# Altium PCB BMS_slave.PcbDoc (part 3 of 5)
Units mm, origin at the board's own origin, x right, y up, seen from the top; angles counter-clockwise.
Board outline 124.71 x 100.58 mm, 4 copper layers (Layer 1 - Top Layer, Layer 2 - GND, Layer 3 - Signal, Layer 4 - Bottom Layer), stack 1.56 mm thick; 370 components, 202 nets, 969 pads, 371 vias.
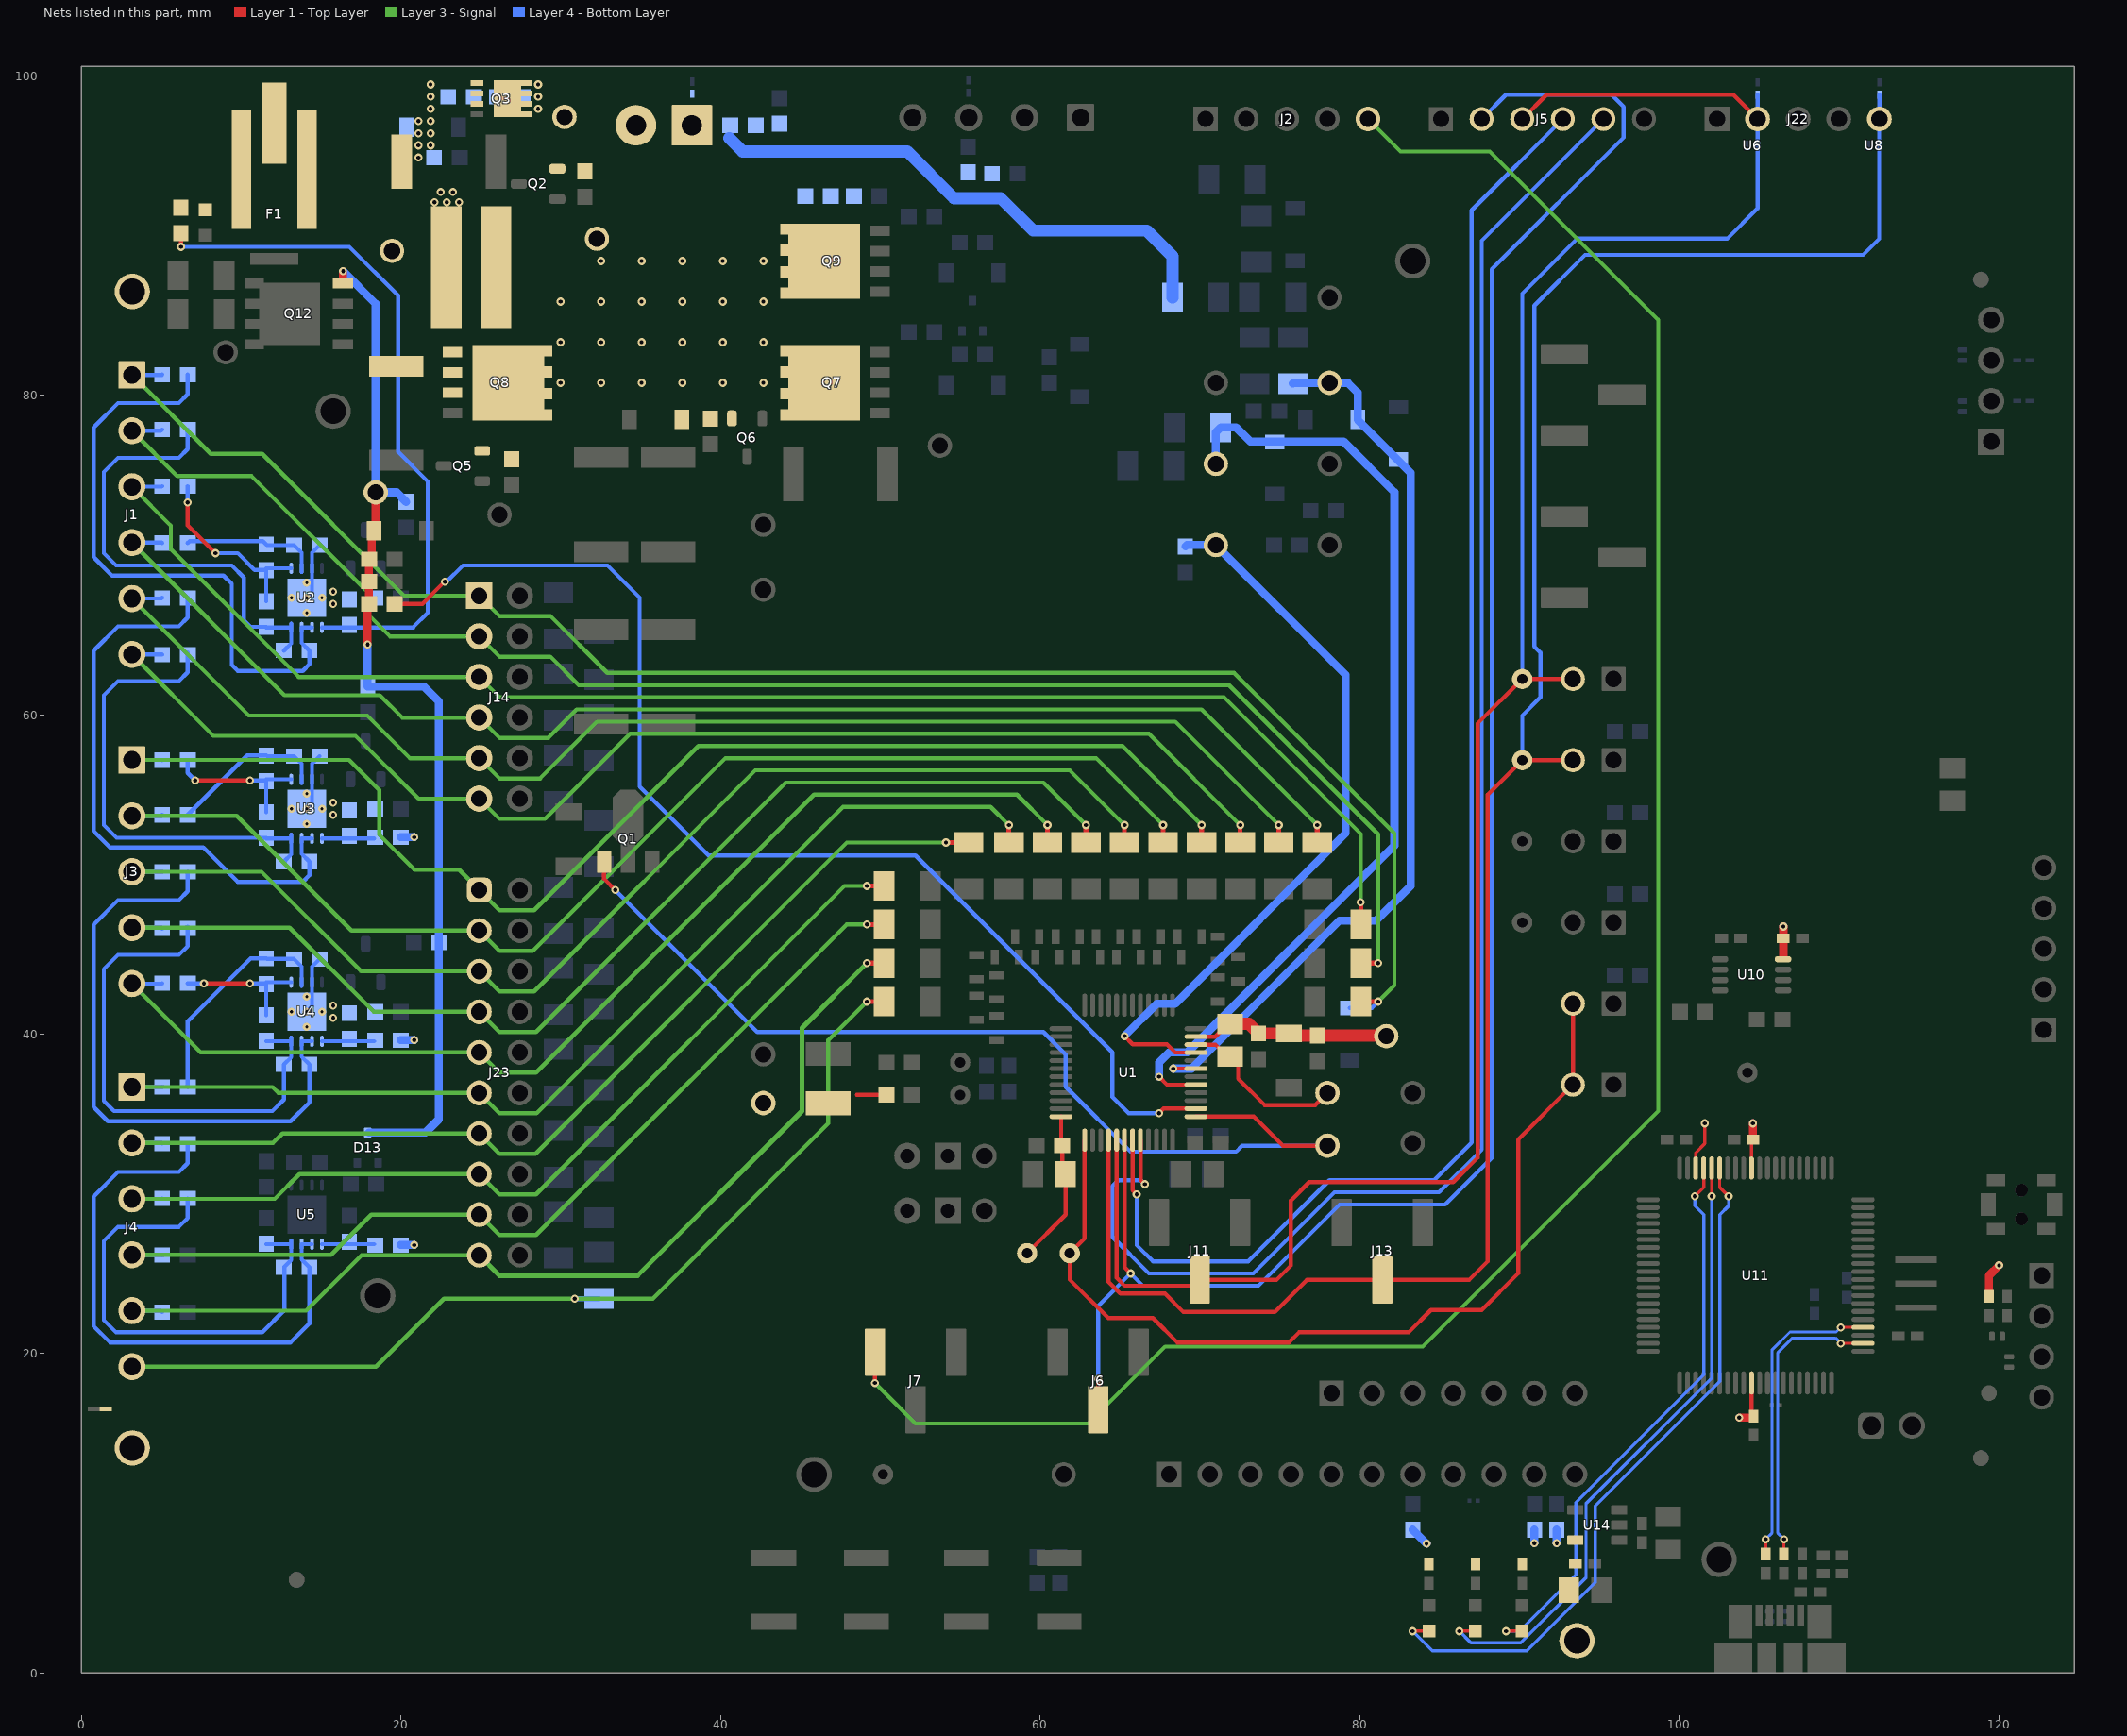
[diagram p4: the nets of this part, all layers, seen from the top]

## Part data (continued)
R61 R62 R63: library part CMP-0025830-4, "RES, 5.1 k, 5%, 0.1 W, AEC-Q200 Grade 0, 0603", Manufacturer=Vishay-Dale, Power_W=100mW, Supplier Part Number 1=541-5.1KGCT-ND, TempCo="200 ppm/C", Tolerance_%=5%, Value2=0.1W, Value_Code=5k10, ValueDisplayed=5.1k, AEC Category=Q200, AEC Grade=0, AEC Qualified=Y, ComponentLink1Description="Datasheet link", ComponentLink1URL=http://www.vishay.com/docs/20035/dcrcwe3.pdf, CompType=Resistor, EIA_Code=E24, MountType=SMT, PackageReference=0603, PartNumber=CRCW06035K10JNEA, Res_ohm=5.1k, RoHS=E, SizeArea_mm2=1.28, SizeX_mm=1.6, SizeY_mm=0.8, SizeZ_mm=1, Supplier 1=Digi-Key, Supplier 2=Newark, Supplier 3=Farnell, Supplier Part Number 2=89M6773, Supplier Part Number 3=1570751, Technology="Thick Film", Value1=5%, VDC_V=75V
R64 R68 R70 R71 R73 R74 R76 R77: library part CMP-0018703-3, "RES, 5.1 k, 5%, 0.25 W, AEC-Q200 Grade 0, 1206", Manufacturer=Vishay-Dale, Power_W=250mW, Supplier Part Number 1=541-5.1KECT-ND, TempCo="200 ppm/C", Tolerance_%=5%, Value2=0.25W, Value_Code=5k10, ValueDisplayed=5.1k, AEC Category=Q200, AEC Grade=0, AEC Qualified=Y, ComponentLink1Description="Datasheet link", ComponentLink1URL=http://www.vishay.com/docs/20035/dcrcwe3.pdf, CompType=Resistor, EIA_Code=E24, MountType=SMT, PackageReference=1206, PartNumber=CRCW12065K10JNEA, Res_ohm=5.1k, RoHS=E, SizeArea_mm2=5.12, SizeX_mm=3.2, SizeY_mm=1.6, SizeZ_mm=1.35, Supplier 1=Digi-Key, Supplier 2=Newark, Supplier 3=Mouser, Supplier Part Number 2=59M8589, Supplier Part Number 3=71-CRCW1206J-5.1K-E3, Technology="Thick Film", Value1=5%, VDC_V=200V
R65: library part CMP-0025855-4, "RES, 7.5 k, 5%, 0.1 W, AEC-Q200 Grade 0, 0603", Manufacturer=Vishay-Dale, Power_W=100mW, Supplier Part Number 1=541-7.5KGCT-ND, TempCo="200 ppm/C", Tolerance_%=5%, Value2=0.1W, Value_Code=7k50, ValueDisplayed=7.5k, AEC Category=Q200, AEC Grade=0, AEC Qualified=Y, ComponentLink1Description="Datasheet link", ComponentLink1URL=http://www.vishay.com/docs/20035/dcrcwe3.pdf, CompType=Resistor, EIA_Code=E24, MountType=SMT, PackageReference=0603, PartNumber=CRCW06037K50JNEA, Res_ohm=7.5k, RoHS=E, SizeArea_mm2=1.28, SizeX_mm=1.6, SizeY_mm=0.8, SizeZ_mm=1, Supplier 1=Digi-Key, Supplier 2=Newark, Supplier 3=Mouser, Supplier Part Number 2=59M6832, Supplier Part Number 3=71-CRCW0603J-7.5K-E3, Technology="Thick Film", Value1=5%, VDC_V=75V
R66: library part CMP-0025753-4, "RES, 20 k, 5%, 0.1 W, AEC-Q200 Grade 0, 0603", Manufacturer=Vishay-Dale, PartNumber=CRCW060320K0JNEA, Power_W=100mW, Supplier Part Number 1=541-20KGCT-ND, TempCo="200 ppm/C", Tolerance_%=5%, Value2=0.1W, Value_Code=20k0, ValueDisplayed=20k, AEC Category=Q200, AEC Grade=0, AEC Qualified=Y, ComponentLink1Description="Datasheet link", ComponentLink1URL=http://www.vishay.com/docs/20035/dcrcwe3.pdf, CompType=Resistor, EIA_Code=E24, LatestRevisionDate=2017-06-13, MountType=SMT, PackageReference=0603, Published=2008-06-26, Publisher="Texas Instruments", Res_ohm=20k, RoHS=E, SizeArea_mm2=1.28, SizeX_mm=1.6, SizeY_mm=0.8, SizeZ_mm=1, Supplier 1=Digi-Key, Supplier 2=Newark, Supplier 3=Mouser, Supplier Part Number 2=59M6783, Supplier Part Number 3=71-CRCW0603J-20K-E3, SymbolVersion=2009-05-29, Technology="Thick Film", U/M=EA, Value1=5%, VDC_V=75V
R80: library part CMP-0025766-4, "RES, 27 k, 5%, 0.1 W, AEC-Q200 Grade 0, 0603", Manufacturer=Vishay-Dale, Power_W=100mW, Supplier Part Number 1=541-27KGCT-ND, TempCo="200 ppm/C", Tolerance_%=5%, Value2=0.1W, Value_Code=27k0, ValueDisplayed=27k, AEC Category=Q200, AEC Grade=0, AEC Qualified=Y, ComponentLink1Description="Datasheet link", ComponentLink1URL=http://www.vishay.com/docs/20035/dcrcwe3.pdf, CompType=Resistor, EIA_Code=E24, MountType=SMT, PackageReference=0603, PartNumber=CRCW060327K0JNEA, Res_ohm=27k, RoHS=E, SizeArea_mm2=1.28, SizeX_mm=1.6, SizeY_mm=0.8, SizeZ_mm=1, Supplier 1=Digi-Key, Supplier 2=Newark, Supplier 3=Mouser, Supplier Part Number 2=59M6792, Supplier Part Number 3=71-CRCW0603J-27K-E3, Technology="Thick Film", Value1=5%, VDC_V=75V
R87 R88 R90 R93 R95 R96 R98 R100 R101 R102 R103 R104 R105 R106 R107 R108: library part CMP-0016776-3, "RES, 200, 1%, 0.25 W, AEC-Q200 Grade 0, 1206", Manufacturer=Vishay-Dale, Power_W=250mW, Supplier Part Number 1=541-200FCT-ND, TempCo="100 ppm/C", Tolerance_%=1%, Value2=0.25W, Value_Code=200R, ValueDisplayed=200, AEC Category=Q200, AEC Grade=0, AEC Qualified=Y, ComponentLink1Description="Datasheet link", ComponentLink1URL=http://www.vishay.com/docs/20035/dcrcwe3.pdf, CompType=Resistor, EIA_Code=E96, MountType=SMT, PackageReference=1206, PartNumber=CRCW1206200RFKEA, Res_ohm=200, RoHS=E, SizeArea_mm2=5.12, SizeX_mm=3.2, SizeY_mm=1.6, SizeZ_mm=1.35, Supplier 1=Digi-Key, Supplier 2=Newark, Supplier 3=Mouser, Supplier Part Number 2=53K2137, Supplier Part Number 3=71-CRCW1206-200-E3, Technology="Thick Film", Value1=1%, VDC_V=200V
R114 R115: library part CMP-0026908-3, "RES, 33, 5%, 0.063 W, AEC-Q200 Grade 0, 0402", Manufacturer=Vishay-Dale, PartNumber=CRCW040233R0JNED, Power_W=63mW, Supplier Part Number 1=541-33JCT-ND, TempCo="200 ppm/C", Tolerance_%=5%, Value2=0.063W, Value_Code=33R0, ValueDisplayed=33, AEC Category=Q200, AEC Grade=0, AEC Qualified=Y, ComponentLink1Description="Datasheet link", ComponentLink1URL=http://www.vishay.com/docs/20035/dcrcwe3.pdf, CompType=Resistor, EIA_Code=E24, LatestRevisionDate=2017-06-12, MountType=SMT, PackageReference=0402, Published=2008-06-26, Publisher="Texas Instruments", Res_ohm=33, RoHS=E, SizeArea_mm2=0.5, SizeX_mm=1, SizeY_mm=0.5, SizeZ_mm=0.6, Supplier 1=Digi-Key, Supplier 2=Newark, Supplier 3=Mouser, Supplier Part Number 2=72M6782, Supplier Part Number 3=71-CRCW0402J-33-E3, SymbolVersion=2009-05-29, Technology="Thick Film", U/M=EA, Value1=5%, VDC_V=50V
R116: library part CMP-0026889-5, "RES, 2.0 k, 5%, 0.063 W, AEC-Q200 Grade 0, 0402", Manufacturer=Vishay-Dale, PartNumber=CRCW04022K00JNED, Power_W=63mW, Supplier Part Number 1=541-2.0KJCT-ND, TempCo="200 ppm/C", Tolerance_%=5%, Value2=0.063W, Value_Code=2k00, ValueDisplayed=2.0k, AEC Category=Q200, AEC Grade=0, AEC Qualified=Y, ComponentLink1Description="Datasheet link", ComponentLink1URL=http://www.vishay.com/docs/20035/dcrcwe3.pdf, CompType=Resistor, EIA_Code=E24, LatestRevisionDate=2017-06-12, MountType=SMT, PackageReference=0402, Published=2008-06-26, Publisher="Texas Instruments", Res_ohm=2k, RoHS=E, SizeArea_mm2=0.5, SizeX_mm=1, SizeY_mm=0.5, SizeZ_mm=0.6, Supplier 1=Digi-Key, Supplier 2=Newark, Supplier 3=Mouser, Supplier Part Number 2=59M6709, Supplier Part Number 3=71-CRCW0402J-2K-E3, SymbolVersion=2009-05-29, Technology="Thick Film", U/M=EA, Value1=5%, VDC_V=50V
R117 R123: library part CMP-0026825-5, "RES, 10 k, 5%, 0.063 W, AEC-Q200 Grade 0, 0402", Manufacturer=Vishay-Dale, PartNumber=CRCW040210K0JNED, Power_W=63mW, Supplier Part Number 1=541-10KJCT-ND, TempCo="200 ppm/C", Tolerance_%=5%, Value2=0.063W, Value_Code=10k0, ValueDisplayed=10k, AEC Category=Q200, AEC Grade=0, AEC Qualified=Y, ComponentLink1Description="Datasheet link", ComponentLink1URL=http://www.vishay.com/docs/20035/dcrcwe3.pdf, CompType=Resistor, EIA_Code=E24, LatestRevisionDate=2017-06-12, MountType=SMT, PackageReference=0402, Published=2008-06-26, Publisher="Texas Instruments", Res_ohm=10k, RoHS=E, SizeArea_mm2=0.5, SizeX_mm=1, SizeY_mm=0.5, SizeZ_mm=0.6, Supplier 1=Digi-Key, Supplier 2=Newark, Supplier 3=Mouser, Supplier Part Number 2=59M6696, Supplier Part Number 3=71-CRCW0402J-10K-E3, SymbolVersion=2009-05-29, Technology="Thick Film", U/M=EA, Value1=5%, VDC_V=50V
R118 R119: library part CMP-0026859-2, "RES, 1.0 M, 5%, 0.063 W, AEC-Q200 Grade 0, 0402", Manufacturer=Vishay-Dale, PartNumber=CRCW04021M00JNED, Power_W=63mW, Supplier Part Number 1=541-1.0MJCT-ND, TempCo="200 ppm/C", Tolerance_%=5%, Value2=0.063W, Value_Code=1M00, ValueDisplayed=1.0M, AEC Category=Q200, AEC Grade=0, AEC Qualified=Y, ComponentLink1Description="Datasheet link", ComponentLink1URL=http://www.vishay.com/docs/20035/dcrcwe3.pdf, CompType=Resistor, EIA_Code=E24, LatestRevisionDate=2017-06-12, MountType=SMT, PackageReference=0402, Published=2008-06-26, Publisher="Texas Instruments", Res_ohm=1M, RoHS=E, SizeArea_mm2=0.5, SizeX_mm=1, SizeY_mm=0.5, SizeZ_mm=0.6, Supplier 1=Digi-Key, Supplier 2=Newark, Supplier 3=Mouser, Supplier Part Number 2=59M6694, Supplier Part Number 3=71-CRCW0402J-1M-E3, SymbolVersion=2009-05-29, Technology="Thick Film", U/M=EA, Value1=5%, VDC_V=50V
R120 R121 R122: library part CMP-0026694-1, "RES, 330, 1%, 0.1 W, AEC-Q200 Grade 0, 0402", Manufacturer=Panasonic, PartNumber=ERJ-2RKF3300X, Power_W=100mW, Supplier Part Number 1=P330LCT-ND, TempCo="100 ppm/C", Tolerance_%=1%, Value2=0.1W, Value_Code=330R, ValueDisplayed=330, AEC Category=Q200, AEC Grade=0, AEC Qualified=Y, ComponentLink1Description="Datasheet link", ComponentLink1URL=http://industrial.panasonic.com/lecs/www-data/pdf/AOA0000/AOA0000CE2.pdf, CompType=Resistor, Green_EU RoHS="Passed with Exemption", Green_EU RoHS-2=Incomplete, Green_Lifecycle=Active, Green_REACh=Passed, LatestRevisionDate=2017-03-09, MountType=SMT, PackageReference=0402, Published=2008-06-26, Publisher="Texas Instruments", Res_ohm=330, RoHS=Y, SizeArea_mm2=0.5, SizeX_mm=1, SizeY_mm=0.5, SizeZ_mm=0.6, Supplier 1=Digi-Key, Supplier 2=Newark, Supplier 3=Farnell, Supplier Part Number 2=64R5277, Supplier Part Number 3=2397127, SymbolVersion=2009-05-29, Technology="Thick Film", U/M=EA, Value1=1%, VDC_V=50V
RT1 RT2: library part CMP-0002341-2, "Thermistor NTC, 10.0k ohm, 1%, Disc, 5x8.4 mm", Manufacturer="SEMITEC Corporation", PartNumber=103AT-2, Power_W=10mW, Supplier Part Number 1=954-103AT-2, Tolerance_%=1%, ComponentLink1Description="Datasheet link", ComponentLink1URL=http://www.semitec.co.jp/english2/products/pdf/AT_Thermistor.pdf, CompType=ThermistorNTC, LatestRevisionDate=09/03/2017, MountType=TH, PackageReference="Disc, 5x8.4 mm", Published=22/09/2009, Publisher="Texas Instruments", RoHS=Y, Series=AT, Supplier 1=Mouser, SymbolVersion=2008-11-25, TaMax_C=110°C, TaMin_C=-50°C, U/M=EA
S1 S2: library part CMP-0002132-2, "Switch, Tactile, SPST-NO, SMT", CurrentRating_mA=50A, Manufacturer="C&K Components", PartNumber=KST221JLFS, Supplier Part Number 1=401-1848-1-ND, Circuit=SPST-NO, ComponentLink1Description="Datasheet URL", ComponentLink1URL=http://www.ck-components.com/index.php?module=media&action=Display&cmpref=14404&lang=en&width=&height=&format=&alt=, CompType=Switch, Green_EU RoHS=Passed, Green_EU RoHS-2=Passed, Green_Lifecycle=Active, Green_REACh=Passed, LatestRevisionDate=2017-03-09, MountType=SMT, Orientation="Top Actuated", PackageReference="Switch, 6.2X5X6.2 mm", PositionCount=1, Publisher="Texas Instruments", RoHS=Y, Supplier 1=Digi-Key, Supplier 2=Mouser, Supplier Part Number 2=611-KST221JLFS, SwitchFunction=Off-Mom, SymbolCreator=a0799628, SymbolVersion=2013-06-10, VDC_V=32V
S3: library part CMP-0002246-2, "Switch, SPST-NO,  Off-Mom, 0.05A, 12VDC, SMD", CurrentRating_mA=50A, Manufacturer="C&K Components", Supplier Part Number 1=CKN10505CT-ND, Circuit=SPST-NO, ComponentLink1Description="Datasheet Link", ComponentLink1URL=http://www.ck-components.com/80184/pts820_4mar13.pdf/, CompType=Switch, LatestRevisionDate=2017-03-09, MountType=SMT, Orientation="Top Actuated", PackageReference=3.9x2.9mm, PartNumber="PTS820 J20M SMTR LFS", PositionCount=1, Publisher="Texas Instruments", RoHS=Y, Supplier 1=Digi-Key, Supplier 2=Mouser, Supplier Part Number 2=611-PTS820J20MSMTR, SwitchFunction=Off-Mom, VDC_V=12V
SH-J1 SH-J2 SH-J3 SH-J4 SH-J5 SH-J6 SH-J7 SH-J8 SH-J9 SH-J10 SH-J11 SH-J12 SH-J13 SH-J14 SH-J15 SH-J16 SH-J17 SH-J18 SH-J19 SH-J20 SH-J21: library part CMP-0003623-3, "Shunt, 100mil, Gold plated, Black", Alternate Manufacturer=3M, Alternate PartNumber=969102-0000-DA, Manufacturer=Samtec, Supplier Part Number 1=SAM8858-ND, ClassName=Shunt, ComponentLink1Description="Datasheet Link", ComponentLink1URL=http://www.samtec.com/ftppub/pdf/SNT.PDF, CompType=Shunt, MountType=N/A, PackageReference=Shunt, PartNumber=SNT-100-BK-G, RoHS=Y, Supplier 1=Digi-Key
TP1: library part CMP-0055147-1, "Test Point, Multipurpose, Red, TH", Color=Red, Manufacturer=Keystone, PartNumber=5010, Supplier Part Number 1=36-5010-ND, CNHeader=FALSE, ComponentLink1Description="Datasheet URL", ComponentLink1URL=http://www.keyelco.com/userAssets/file/M60-2p60.pdf, CompType="Test Point", ContactFinish=Silver, CT=TRUE, Green_EU RoHS=Passed, Green_EU RoHS-2=Incomplete, Green_Lifecycle=Active, Green_REACh=Passed, LatestRevisionDate=26/05/2017, MountType=TH, PackageReference="Red Multipurpose Testpoint", Publisher="Texas Instruments", RoHS=Y, Supplier 1=Digi-Key, Supplier 2=Mouser, Supplier Part Number 2=534-5010
TP2 TP3 TP4 TP5 TP6 TP7 TP8 TP10 TP11 TP12 TP13 TP18 TP19 TP20 TP21 TP22 TP23 TP24 TP25 TP26 TP27 TP28 TP29 TP30 TP31 TP32 TP33 TP34 TP35 TP36 TP37 TP38 TP39 TP40 TP41 TP42: library part CMP-0078143-2, "TEST POINT.  No entry in BOM.", Manufacturer=N/A, CompType=Testpoint, PackageReference=N/A, PartNumber=N/A
TP9: library part CMP-0055148-1, "Test Point, Multipurpose, Black, TH", Color=Black, Manufacturer=Keystone, PartNumber=5011, Supplier Part Number 1=36-5011-ND, CNHeader=FALSE, ComponentLink1Description="Datasheet URL", ComponentLink1URL=http://www.keyelco.com/userAssets/file/M60-2p60.pdf, CompType="Test Point", ContactFinish=Silver, CT=TRUE, Green_EU RoHS=Passed, Green_EU RoHS-2=Incomplete, Green_Lifecycle=Active, Green_REACh=Passed, LatestRevisionDate=26/05/2017, MountType=TH, PackageReference="Black Multipurpose Testpoint", Publisher="Texas Instruments", RoHS=Y, Supplier 1=Digi-Key, Supplier 2=Mouser, Supplier Part Number 2=534-5011
TP14 TP15 TP16 TP17: library part CMP-0055143-1, "Test Point, Compact, Black, TH", Color=Black, Manufacturer=Keystone, Supplier Part Number 1=36-5006-ND, CNHeader=FALSE, ComponentLink1Description="Datasheet URL", ComponentLink1URL=http://www.keyelco.com/userAssets/file/M60-2p60.pdf, CompType="Test Point", ContactFinish=Silver, CT=TRUE, Green_EU RoHS=Passed, Green_EU RoHS-2=Incomplete, Green_Lifecycle=Active, Green_REACh=Passed, LatestRevisionDate=26/05/2017, MountType=TH, PackageReference="Black Compact Testpoint", PartNumber=5006, Publisher="Texas Instruments", RoHS=Y, Supplier 1=Digi-Key, Supplier 2=Mouser, Supplier Part Number 2=534-5006, SymbolVersion=2008-04-04
TP43 TP44: library part CMP-0055142-1, "Test Point, Compact, Red, TH", Color=Red, Manufacturer=Keystone, Supplier Part Number 1=36-5005-ND, CNHeader=FALSE, ComponentLink1Description="Datasheet URL", ComponentLink1URL=http://www.keyelco.com/userAssets/file/M60-2p60.pdf, CompType="Test Point", ContactFinish=Silver, CT=TRUE, Green_EU RoHS=Passed, Green_EU RoHS-2=Passed, Green_Lifecycle=Active, Green_REACh=Passed, LatestRevisionDate=26/05/2017, MountType=TH, PackageReference="Red Compact Testpoint", PartNumber=5005, Publisher="Texas Instruments", RoHS=Y, Supplier 1=Digi-Key, Supplier 2=Mouser, Supplier Part Number 2=534-5005, SymbolVersion=2008-04-04, U/M=EA
TP45: library part CMP-0003825-1, "1mm Test Point, SMT", Manufacturer=Any, PartNumber=TP_SM_1MM, ComponentLink1Description="Datasheet Link", ComponentLink1URL=https://sps06.itg.ti.com/sites/KMS/crossdivteams/altium/docs/ComponentDatasheets/PROBE_TEST_POINT.png, CompType="Test Point", Key=TP_SM_1MM, LatestRevisionDate=2017-03-09, MountType=SMT, PackageReference="1mm Test Point, SMT", Publisher="Texas Instruments", SymbolVersion=2010-10-20
U1: library part CMP-0084229-1, "Multicell Battery Monitor and Protection Family, PFB0048A (TQFP-48)", Alternate Manufacturer="Texas Instruments", Alternate PartNumber=bq76952PFBR, AEC Category=Q200, AEC Qualified=N, ComponentLink1Description="Datasheet Link", ComponentLink1URL=http://www.ti.com/lit/ds/symlink/bq76952.pdf, ComponentLink2Description="Product Folder", ComponentLink2URL=http://www.ti.com/product/bq76952, ComponentLink3Description="Online Datasheet", ComponentLink3URL=http://www.ti.com/product/bq76952/datasheet, CompType=IC, Manufacturer="Texas Instruments", MountType=SMT, PackageDescription=TQFP-48, PackageReference=PFB0048A, PartNumber=bq76952PFBT, SizeArea_mm2=81, SizeAreaWB_mm2=121, SizeX_mm=9, SizeY_mm=9, SizeZ_mm=1.2
U2 U3 U4 U5: library part CMP-0078902-2, "Family 2-5S Overvoltage Protector with Internal Delay Timer, DPJ0008A (WSON-8)", Alternate Manufacturer="Texas Instruments", Alternate PartNumber=BQ771807DPJT, AEC Category=Q200, AEC Qualified=N, ComponentLink1Description="Datasheet Link", ComponentLink1URL=http://www.ti.com/lit/ds/symlink/bq7718.pdf, ComponentLink2Description="Product Folder", ComponentLink2URL=http://www.ti.com/product/bq7718, CompType=IC, Manufacturer="Texas Instruments", MountType=SMT, PackageDescription=WSON-8, PackageReference=DPJ0008A, PartNumber=BQ771807DPJR, RoHS=Y, SizeArea_mm2=12, SizeAreaWB_mm2=20, SizeX_mm=4, SizeY_mm=3, SizeZ_mm=0.8
U6 U7 U8 U9: library part CMP-0043093-3, "Single-Channel ESD in 0402 Package With 10pF Capacitance and 6V Breakdown, DPY0002A (X1SON-2)", Alternate Manufacturer="Texas Instruments", Alternate PartNumber=TPD1E10B06DPYT, Breakdown Voltage(Min)(V)=6, IO Capacitance(Typ)(pF)=10, Operating Temperature Range="-40 to 125 C", Rating=Catalog, AEC Category=Q200, AEC Qualified=N, ComponentLink1Description="Datasheet Link", ComponentLink1URL=http://www.ti.com/lit/ds/symlink/tpd1e10b06.pdf, ComponentLink2Description="Product Folder", ComponentLink2URL=http://www.ti.com/product/tpd1e10b06, ComponentLink3Description="Online Datasheet", ComponentLink3URL=http://www.ti.com/product/tpd1e10b06/datasheet, CompType=IC, Eco-Plan=TBD, Green_EU RoHS=Passed, Green_EU RoHS-2=Passed, Green_Lifecycle=Active, Green_REACh=Passed, IEC 61000-4-2 Air-Gap(+/- kV)=30, IEC 61000-4-2 Contact(+/- kV)=30, IO Leakage Current(nA)=10, Manufacturer="Texas Instruments", MountType=SMT, PackageDescription=X1SON-2, PackageReference=DPY0002A, PartNumber=TPD1E10B06DPYR, RoHS=Y, SizeArea_mm2=0.6, SizeAreaWB_mm2=3.2, SizeX_mm=1.0, SizeY_mm=0.6, SizeZ_mm=0.45
U10: library part CMP-0051048-2, "Dual-Bit Dual Supply Transceiver with Configurable Voltage Translation and 3-State Outputs, DCT0008A, LARGE T&R", F @ Nom Voltage(Max)(Mhz)=150, Generic Part Number=SN74LVC2T45, ICC @ Nom Voltage(Max)(mA)=0.004, Manufacturer="Texas Instruments", Operating Temperature Range(C)="-40 to 85", Rating=Military, tpd @ Nom Voltage(Max)(ns)=17.7,10.3,8.3,7.2, Voltage(Nom)(V)=1.8,2.5,3.3,5, 3-State Output=Yes, AEC Category=Q200, AEC Qualified=N, Bits(#)=2, ComponentLink1Description="Datasheet Link", ComponentLink1URL=http://www.ti.com/lit/ds/symlink/sn74lvc2t45.pdf, ComponentLink2Description="Product Folder", ComponentLink2URL=http://www.ti.com/product/sn74lvc2t45, CompType=IC, DatasheetVersion=SCES516J, Input Type=CMOS/TTL, Logic=True, MountType=SMT, Output Drive (IOL/IOH)(Max)(mA)=32/-32, Output Type=CMOS, PackageDescription=SSOP-8, PackageReference=DCT0008A, PartNumber=SN74LVC2T45DCTR, RoHS=Y, Schmitt Trigger=No, SizeArea_mm2=11.2, SizeAreaWB_mm2=19, SizeX_mm=4, SizeY_mm=2.8, SizeZ_mm=1.3, Sub-Family="Dual Supply Translator", Technology Family=LVC, VCC(Max)(V)=5.5, VCC(Min)(V)=1.65
U11: "25 MHz Mixed Signal Microcontroller with 128 KB Flash, 8192 B SRAM and 63 GPIOs, -40 to 85 degC, 80-pin QFP (PN), Green (RoHS & no Sb/Br)", Frequency(MHz)=25, Manufacturer="Texas Instruments", PartNumber=MSP430F5529IPN, Temp Sensor=Yes, ADC="12-bit SAR", ADC Channels=16, Brown Out Reset=Yes, Code_JEDEC=MS-018, Comparators=Yes, ComponentLink1Description="Manufacturer URL", ComponentLink1URL=http://www.ti.com/, ComponentLink2Description=Datasheet, ComponentLink2URL=http://www.ti.com/general/docs/lit/getliterature.tsp?genericPartNumber=MSP430F5529&fileType=pdf, ComponentLink3Description="Package Specification", ComponentLink3URL=http://www.ti.com/lit/ml/mtqf010a/mtqf010a.pdf, DatasheetVersion=SLAS590I, DMA=3, Eco-Plan="Green (RoHS & no Sb/Br)", Flash(KB)=128, GPIO=63, Mounting Technology="Surface Mount", Multiplier=32x32, PackageDescription="80-Pin Plastic Quad Flat Pack, Body 12 x 12 mm, Pitch 0.5 mm", PackageReference=PN0080A, Real-Time Clock=Yes, SRAM(B)=8192, SubFamily="5 Series", SVS=Yes, Timers - 16-bit=4, USB=1, USCI_A (UART/LIN/IrDA/SPI)=2, USCI_B (I2C & SPI)=2, Watchdog=Yes
U12 U13 U15 U16: library part CMP-0043094-3, "Single-Channel ESD in 0402 Package With 10pF Capacitance and 6V Breakdown, DPY0002A (X1SON-2)", Alternate Manufacturer="Texas Instruments", Alternate PartNumber=TPD1E10B06DPYR, Breakdown Voltage(Min)(V)=6, IO Capacitance(Typ)(pF)=10, Operating Temperature Range="-40 to 125 C", Rating=Catalog, AEC Category=Q200, AEC Qualified=N, ComponentLink1Description="Datasheet Link", ComponentLink1URL=http://www.ti.com/lit/ds/symlink/tpd1e10b06.pdf, ComponentLink2Description="Product Folder", ComponentLink2URL=http://www.ti.com/product/tpd1e10b06, ComponentLink3Description="Online Datasheet", ComponentLink3URL=http://www.ti.com/product/tpd1e10b06/datasheet, CompType=IC, Eco-Plan=TBD, IEC 61000-4-2 Air-Gap(+/- kV)=30, IEC 61000-4-2 Contact(+/- kV)=30, IO Leakage Current(nA)=10, Manufacturer="Texas Instruments", MountType=SMT, PackageDescription=X1SON-2, PackageReference=DPY0002A, PartNumber=TPD1E10B06DPYT, RoHS=Y, SizeArea_mm2=0.6, SizeAreaWB_mm2=3.2, SizeX_mm=1.0, SizeY_mm=0.6, SizeZ_mm=0.45
U14: "Single Output LDO, 150 mA, Fixed 3.3 V Output, 2.7 to 10 V Input, with Low IQ, 5-pin SOT-23 (DBV), -40 to 125 degC, Green (RoHS & no Sb/Br)", Manufacturer="Texas Instruments", PartNumber=TPS76333DBVR, Accuracy(%)=3, Code_JEDEC=MO-178, ComponentLink1Description="Manufacturer URL", ComponentLink1URL=http://www.ti.com/, ComponentLink2Description=Datasheet, ComponentLink2URL=http://www.ti.com/general/docs/lit/getliterature.tsp?genericPartNumber=TPS76333&fileType=pdf, ComponentLink3Description="Package Specification", ComponentLink3URL=http://www.ti.com/litv/pdf/mpds018i, DatasheetVersion=SLVS181H, Eco-Plan="Green (RoHS & no Sb/Br)", Fixed Output Options(V)=3.3, Iout(Max)(A)=0.15, Iq(Typ)(mA)=0.08, Mounting Technology="Surface Mount", PackageDescription="5-Pin Plastic Small Outline, Body 1.60 Ãƒâ€” 2.90 mm, Pitch 0.95 mm", PackageReference=DBV0005A, PackageVersion=4073253-4/K, SubFamily="Single Channel LDO", Vdo(Typ)(mV)=300, Vin(Max)(V)=10, Vin(Min)(V)=2.7, Vout Adj(Max)(V)=3.3, Vout Adj(Min)(V)=3.3
Y1: library part CMP-0084387-1, "Resonator, 4 MHz, 39 pF, AEC-Q200 Grade 1, SMD", Frequency_Fixed=4MHz, Load Capacitance="39 pF", Manufacturer=MuRata, AEC Category=Q200, AEC Grade=1, AEC Qualified=Y, ComponentLink1Description="Datasheet Link", ComponentLink1URL=https://www.murata.com/~/media/webrenewal/support/library/catalog/products/timingdevice/ceralock/p16e.ashx, CompType=Resonator, MountType=SMT, PackageReference="4.5x1.2x2 mm", PartNumber=CSTCR4M00G55B-R0, RoHS=Y, SizeArea_mm2=9, SizeAreaWB_mm2=16.5, SizeX_mm=4.5, SizeY_mm=2, SizeZ_mm=1.2, TaMax_C=125°C, TaMin_C=-40°C
ZZ1: library part CMP-0077236-1, ClassName=AssemblyNote, CompType=AssemblyNote, Key=AssemblyNote, LatestRevisionDate=2017-08-10, Publisher="Texas Instruments"
ZZ2: library part CMP-0077237-1, ClassName=AssemblyNote, CompType=AssemblyNote, Key=AssemblyNote, LatestRevisionDate=2017-08-10, Publisher="Texas Instruments"
ZZ3: library part CMP-0077238-1, ClassName=AssemblyNote, CompType=AssemblyNote, Key=AssemblyNote, LatestRevisionDate=2017-08-10, Publisher="Texas Instruments"

## Via types
v1: diameter 0.508, hole 0.254, Layer 1 - Top Layer to Layer 4 - Bottom Layer, tented both sides, 339 vias
v2: diameter 0.5, hole 0.2, Layer 1 - Top Layer to Layer 4 - Bottom Layer, tented both sides, 32 vias

## Nets (pads, with @x,y where several pads share a name; then routed paths per layer and width w, separated by ;. In a path a pad name is that pad's centre, name@x,y a point inside that pad or via, vN(x,y) a via of type N, cw(c..) or ccw(c..) an arc to the next point about the centre after c; other vN are vias at no path point)
1P: J4.5 J23.19 R23.1 R86.1 | length 62.1
  Layer 1 - Top Layer w0.305: v1(49.149,44.45) R23.1@50.239,44.45
  Layer 3 - Signal w0.254: J4.5@3.148,22.69 14.054,22.69 17.526,26.162 J23.19@24.892,26.162
  Layer 3 - Signal w0.305: J23.19@24.892,26.162 26.162,24.892 34.798,24.892 45.085,35.179 45.085,40.386 v1(49.149,44.45)
  Layer 4 - Bottom Layer w0.254: J4.5@3.148,22.69 4.958,22.69 R86.1@5.042,22.606
2P: J4.4 J23.17 R22.1 R85.1 | length 58.6
  Layer 1 - Top Layer w0.305: v1(49.149,46.863) R22.1@50.239,46.863
  Layer 3 - Signal w0.254: J4.4@3.148,26.19 15.616,26.19 18.128,28.702 J23.17@24.892,28.702 26.162,27.432 28.448,27.432 47.879,46.863 v1(49.149,46.863)
  Layer 4 - Bottom Layer w0.254: J4.4@3.148,26.19 5.014,26.19 R85.1@5.042,26.162
3.3V: C59.2 C64.1 C65.1 C68.1 C69.1 R109.1 R110.1 R111.1 R120.2 R121.2 R122.2 R123.2 TP44.1 U10.8 U11.11 U11.18 U11.50 U14.5 | length 16
  Layer 1 - Top Layer w0.203: U11.18@101.025,31.617 101.025,32.572 101.6,33.147 v1(101.6,34.417) ; U11.11@104.525,31.617 104.525,33.313 C69.1@104.613,33.401
  Layer 1 - Top Layer w0.254: U11.50@104.525,18.167 104.525,16.217 C68.1@104.648,16.094
  Layer 1 - Top Layer w0.508: v1(103.759,16.002) 104.556,16.002 C68.1@104.648,16.094 ; C69.1@104.613,33.401 v1(104.613,34.417) ; U10.8@106.512,44.78 C59.2@106.512,45.999 v1(106.512,46.736) ; R123.2@119.38,23.587 119.38,24.892 v1(120.015,25.527)
  Layer 4 - Bottom Layer w0.508: R111.1@83.312,8.979 v1(84.182,8.109) ; v1(90.932,8.128) R110.1@90.932,8.979 ; v1(92.329,8.128) R109.1@92.329,8.979
3P: J4.3 J23.15 R21.1 R84.1 | length 58.2
  Layer 1 - Top Layer w0.305: v1(49.149,49.276) R21.1@50.239,49.276
  Layer 3 - Signal w0.254: J4.3@3.148,29.69 12.092,29.69 13.644,31.242 J23.15@24.892,31.242 26.162,29.972 28.448,29.972 47.752,49.276 v1(49.149,49.276)
  Layer 4 - Bottom Layer w0.254: J4.3@3.148,29.69 5.014,29.69 R84.1@5.042,29.718
4P: C49.1 C52.1 J4.2 J23.13 R19.1 R79.1 R81.1 R83.1 U4.7 U4.9 | length 67.6
  Layer 1 - Top Layer w0.305: v1(54.102,51.996) R19.1@55.499,51.996
  Layer 3 - Signal w0.254: J4.2@3.148,33.19 11.981,33.19 12.573,33.782 J23.13@24.892,33.782 26.162,32.512 28.416,32.512 47.9,51.996 v1(54.102,51.996)
  Layer 4 - Bottom Layer w0.254: J4.2@3.148,33.19 4.999,33.19 R83.1@5.042,33.147 ; v2(14.097,41.402) 14.422,41.727 U4.7@14.422,43.252 14.422,44.229 C52.1@14.897,44.704
  Layer 4 - Bottom Layer w0.508: R81.1@19.977,26.797 v1(20.828,26.797)
  other v1: 15.748,41.021 15.748,41.783
  other v2: 14.097,40.452 13.147,41.402 15.047,41.402 14.097,42.352
5P: J4.1 J23.11 R18.1 R78.1 | length 67
  Layer 1 - Top Layer w0.305: R18.1@58.039,51.996 v1(58.039,53.086)
  Layer 3 - Signal w0.254: J4.1@3.148,36.69 11.951,36.69 12.319,36.322 J23.11@24.892,36.322 26.162,35.052 28.48,35.052 47.657,54.229 56.896,54.229 v1(58.039,53.086)
  Layer 4 - Bottom Layer w0.254: J4.1@3.148,36.69 5.029,36.69 R78.1@5.042,36.703
6P: J3.5 J23.9 R17.1 R75.1 | length 70.6
  Layer 1 - Top Layer w0.305: R17.1@60.452,51.996 v1(60.452,53.086)
  Layer 3 - Signal w0.254: J3.5@3.148,43.165 7.451,38.862 J23.9@24.892,38.862 26.162,37.592 28.448,37.592 45.847,54.991 58.547,54.991 v1(60.452,53.086)
  Layer 4 - Bottom Layer w0.254: J3.5@3.148,43.165 5.027,43.165 R75.1@5.042,43.18
7P: J3.4 J23.7 R16.1 R72.1 | length 73
  Layer 1 - Top Layer w0.305: R16.1@62.865,51.996 v1(62.865,53.086)
  Layer 3 - Signal w0.254: J3.4@3.148,46.665 13.025,46.665 18.288,41.402 J23.7@24.892,41.402 26.162,40.132 28.448,40.132 44.069,55.753 60.198,55.753 v1(62.865,53.086)
  Layer 4 - Bottom Layer w0.254: J3.4@3.148,46.665 4.986,46.665 R72.1@5.042,46.609
8P: C41.1 C46.1 J3.3 J23.5 R14.1 R58.1 R67.1 R69.1 U3.7 U3.9 | length 79.9
  Layer 1 - Top Layer w0.305: R14.1@65.278,51.996 v1(65.278,53.086)
  Layer 3 - Signal w0.254: J3.3@3.148,50.165 11.265,50.165 17.488,43.942 J23.5@24.892,43.942 26.162,42.672 28.321,42.672 42.164,56.515 61.849,56.515 v1(65.278,53.086)
  Layer 4 - Bottom Layer w0.254: J3.3@3.148,50.165 R69.1@5.042,50.165 ; v2(14.097,54.102) 14.422,54.427 U3.7@14.422,55.952 14.422,56.929 C46.1@14.897,57.404
  Layer 4 - Bottom Layer w0.508: R67.1@19.977,39.624 v1(20.828,39.624)
  other v1: 15.748,53.721 15.748,54.483
  other v2: 14.097,53.152 13.147,54.102 15.047,54.102 14.097,55.052
9P: J3.2 J23.3 R13.1 R54.1 | length 77.8
  Layer 1 - Top Layer w0.305: R13.1@67.691,51.996 v1(67.691,53.086)
  Layer 3 - Signal w0.254: J3.2@3.148,53.665 9.708,53.665 16.891,46.482 J23.3@24.892,46.482 26.162,45.212 28.243,45.212 40.308,57.277 63.5,57.277 v1(67.691,53.086)
  Layer 4 - Bottom Layer w0.254: J3.2@3.148,53.665 4.986,53.665 R54.1@5.042,53.721
10P: J3.1 J23.1 R12.1 R53.1 | length 81.8
  Layer 1 - Top Layer w0.305: R12.1@70.104,51.996 v1(70.104,53.086)
  Layer 3 - Signal w0.254: J3.1@3.148,57.165 16.749,57.165 18.626,55.288 18.626,52.494 20.828,50.292 23.622,50.292 J23.1@24.892,49.022 26.162,47.752 28.321,47.752 38.608,58.039 65.151,58.039 v1(70.104,53.086)
  Layer 4 - Bottom Layer w0.254: J3.1@3.148,57.165 5.027,57.165 R53.1@5.042,57.15
11P: J1.6 J14.11 R11.1 R49.1 | length 81.2
  Layer 1 - Top Layer w0.305: R11.1@72.517,51.996 v1(72.517,53.086)
  Layer 3 - Signal w0.254: J1.6@3.148,63.767 8.241,58.674 17.145,58.674 21.082,54.737 J14.11@24.892,54.737 26.162,53.467 29.009,53.467 34.343,58.801 66.802,58.801 v1(72.517,53.086)
  Layer 4 - Bottom Layer w0.254: J1.6@3.148,63.767 5.029,63.767 R49.1@5.042,63.754
12P: C32.1 C39.1 J1.5 J14.9 R8.1 R38.1 R41.1 R47.1 U2.7 U2.9 | length 88.1
  Layer 1 - Top Layer w0.305: R8.1@74.93,51.996 v1(74.93,53.086)
  Layer 3 - Signal w0.254: J1.5@3.148,67.267 10.471,59.944 17.879,59.944 20.546,57.277 J14.9@24.892,57.277 26.162,56.007 28.702,56.007 32.258,59.563 68.453,59.563 v1(74.93,53.086)
  Layer 4 - Bottom Layer w0.254: J1.5@3.148,67.267 4.999,67.267 R47.1@5.042,67.31 ; v2(14.097,67.31) 14.422,67.635 U2.7@14.422,69.16 14.422,70.137 C39.1@14.897,70.612
  Layer 4 - Bottom Layer w0.508: R41.1@19.977,52.324 v1(20.828,52.324)
  other v1: 15.748,66.929 15.748,67.691
  other v2: 14.097,66.36 13.147,67.31 15.047,67.31 14.097,68.26
13P: J1.4 J14.7 R7.1 R37.1 | length 86
  Layer 1 - Top Layer w0.305: R7.1@77.343,51.996 v1(77.343,53.086)
  Layer 3 - Signal w0.254: J1.4@3.148,70.767 12.701,61.214 18.669,61.214 20.066,59.817 J14.7@24.892,59.817 26.162,58.547 29.21,58.547 30.988,60.325 70.104,60.325 v1(77.343,53.086)
  Layer 4 - Bottom Layer w0.254: J1.4@3.148,70.767 5.014,70.767 R37.1@5.042,70.739
14P: J1.3 J14.5 R4.1 R36.1 | length 94.3
  Layer 1 - Top Layer w0.305: R4.1@80.063,46.863 v1(80.063,48.26)
  Layer 3 - Signal w0.254: J1.3@3.148,74.267 5.588,71.827 5.588,70.358 13.589,62.357 J14.5@24.892,62.357 26.162,61.087 71.501,61.087 80.063,52.525 v1(80.063,48.26)
  Layer 4 - Bottom Layer w0.254: J1.3@3.148,74.267 5.014,74.267 R36.1@5.042,74.295
15P: J1.2 J14.3 R3.1 R34.1 | length 100.4
  Layer 1 - Top Layer w0.305: R3.1@80.063,44.45 v1(81.153,44.45)
  Layer 3 - Signal w0.254: J1.2@3.148,77.767 5.985,74.93 10.648,74.93 17.996,67.582 17.996,66.205 19.304,64.897 J14.3@24.892,64.897 26.162,63.627 29.337,63.627 31.115,61.849 71.817,61.849 81.153,52.513 v1(81.153,44.45)
  Layer 4 - Bottom Layer w0.254: J1.2@3.148,77.767 4.958,77.767 R34.1@5.042,77.851
16P: D1.2 D3.2 F1.1 J1.1 J14.1 NT2.2 R2.1 R31.1 R32.1 TP1.1 | length 106.8
  Layer 1 - Top Layer w0.305: R2.1@80.063,42.037 v1(81.153,42.037)
  Layer 3 - Signal w0.254: J1.1@3.148,81.267 8.088,76.327 11.303,76.327 20.193,67.437 J14.1@24.892,67.437 26.162,66.167 29.345,66.167 32.901,62.611 72.132,62.611 82.169,52.574 82.169,43.053 v1(81.153,42.037)
  Layer 4 - Bottom Layer w0.254: J1.1@3.148,81.267 5.029,81.267 R32.1@5.042,81.28 ; D1.2@79.375,41.642 80.759,41.642 v1(81.153,42.037)
ALERT: J20.2 J21.2 TP41.1 U1.25 | length 58.9
  Layer 1 - Top Layer w0.254: U1.25@62.782,33.367 62.782,27.222 TP41.1@61.849,26.289 61.849,24.638 64.262,22.225 67.056,22.225 68.58,20.701 75.565,20.701 76.2,21.336 83.058,21.336 84.455,22.733 87.63,22.733 89.916,25.019 89.916,33.401 J21.2@93.345,36.83 J20.2@93.345,41.91
BAT-: J4.6 NT1.2 R24.1 R27.1 R30.2 R108.1 TP9.1 TP19.1 | length 63
  Layer 1 - Top Layer w0.254: 48.514,36.195 R27.1@50.381,36.195
  Layer 1 - Top Layer w0.305: v1(49.149,42.037) R24.1@50.239,42.037
  Layer 3 - Signal w0.254: J4.6@3.148,19.19 18.428,19.19 22.68,23.442 v1(30.861,23.442) 35.761,23.442 46.736,34.417 46.736,39.624 v1(49.149,42.037)
  Layer 4 - Bottom Layer w0.305: v1(30.861,23.442) R108.1@32.385,23.442
BREG: Q1.1 TP4.1 U1.37 | length 63.8
  Layer 1 - Top Layer w0.254: Q1.1@32.705,50.805 32.705,49.718 v1(33.401,49.022) ; U1.37@69.757,34.842 73.362,34.842 75.184,33.02 TP4.1@77.978,33.02
  Layer 4 - Bottom Layer w0.254: v1(33.401,49.022) 42.291,40.132 60.198,40.132 61.595,38.735 61.595,36.703 65.659,32.639 72.263,32.639 72.644,33.02 TP4.1@77.978,33.02
CD: D2.2 Q5.2 Q6.2 Q7.5 Q7.6 Q7.7 Q7.8 Q7.9 Q8.5 Q8.6 Q8.7 Q8.8 Q8.9 Q9.5 Q9.6 Q9.7 Q9.8 Q9.9 R42.1 R43.1 R46.2 TP23.1
  other v1: 29.972,80.772 32.512,80.772 35.052,80.772 37.592,80.772 40.132,80.772 42.672,80.772 29.972,83.312 32.512,83.312 35.052,83.312 37.592,83.312 40.132,83.312 42.672,83.312 29.972,85.852 32.512,85.852 35.052,85.852 37.592,85.852 40.132,85.852 42.672,85.852 32.512,88.392 35.052,88.392 37.592,88.392 40.132,88.392 42.672,88.392
CFETOFF: E3.1 J5.3 J10.2 J11.2 J22.2 TP37.1 U1.29 U6.1 | length 135.6
  Layer 1 - Top Layer w0.254: U1.29@64.782,33.367 64.782,24.753 65.278,24.257 69.618,24.257 J11.2@69.977,24.616 74.781,24.616 75.692,25.527 75.692,29.591 76.835,30.734 85.852,30.734 87.376,32.258 87.376,59.436 TP37.1@90.17,62.23 J10.2@93.345,62.23 ; J5.3@90.17,97.282 91.694,98.806 103.378,98.806 J22.2@104.902,97.282
  Layer 4 - Bottom Layer w0.254: TP37.1@90.17,62.23 90.17,86.36 93.599,89.789 102.997,89.789 104.897,91.689 U6.1@104.897,95.631 104.897,97.277 J22.2@104.902,97.282 E3.1@104.902,98.806
CHG: R61.1 TP30.1 U1.45 | length 47.4
  Layer 1 - Top Layer w0.254: v1(65.278,39.878) 65.786,39.37 67.925,39.37 68.453,38.842 U1.45@69.757,38.842
  Layer 4 - Bottom Layer w0.508: v1(65.278,39.878) 67.31,41.91 68.453,41.91 79.121,52.578 79.121,62.484 TP30.1@70.993,70.612 69.177,70.612 R61.1@69.088,70.523
CPACK+: C30.1 C34.1 E1.1 J8.1 J8.2 Q2.2 Q3.5 Q3.6 Q3.7 Q3.8 Q3.9 R35.1 R71.1 TP20.1 | length 66.8
  Layer 4 - Bottom Layer w0.762: 41.377,95.25 40.538,96.088 41.377,95.25 ; 41.377,95.25 51.689,95.25 ; 41.377,95.25 51.689,95.25 ; 51.689,95.25 54.61,92.329 ; 51.689,95.25 54.61,92.329 ; 54.61,92.329 57.531,92.329 ; 54.61,92.329 57.531,92.329 ; 57.531,92.329 59.563,90.297 ; 57.531,92.329 59.563,90.297 ; 59.563,90.297 66.675,90.297 ; 59.563,90.297 66.675,90.297 ; 66.675,90.297 68.273,88.699 ; 66.675,90.297 68.273,88.699 ; 68.273,88.699 R71.1@68.273,86.106 68.273,88.699
  other v1: 28.575,97.917 28.575,98.679 28.575,99.441
DCHG: J5.4 U1.31 | length 97.6
  Layer 1 - Top Layer w0.254: U1.31@65.782,33.367 65.782,30.23 v1(66.04,29.972)
  Layer 4 - Bottom Layer w0.254: v1(66.04,29.972) 66.04,26.797 67.056,25.781 73.025,25.781 78.105,30.861 84.644,30.861 86.995,33.212 86.995,91.567 J5.4@92.71,97.282
DDSG: J5.5 U1.32 | length 103.3
  Layer 1 - Top Layer w0.254: U1.32@66.282,33.367 66.282,30.873 v1(66.548,30.607)
  Layer 4 - Bottom Layer w0.254: v1(66.548,30.607) 66.294,30.861 64.897,30.861 64.516,30.48 64.516,27.312 66.809,25.019 73.341,25.019 78.421,30.099 84.959,30.099 87.63,32.77 87.63,89.662 J5.5@95.25,97.282
DFETOFF: J5.2 J6.2 U1.30 | length 123.2
  Layer 1 - Top Layer w0.254: J6.2@63.627,16.488 v1(63.627,18.415) ; U1.30@65.282,33.367 65.282,25.396 v1(65.659,25.019)
  Layer 4 - Bottom Layer w0.254: v1(63.627,18.415) 63.627,22.987 v1(65.659,25.019) 66.421,24.257 73.66,24.257 78.74,29.337 85.344,29.337 88.265,32.258 88.265,87.884 96.52,96.139 96.52,98.044 95.758,98.806 89.154,98.806 J5.2@87.63,97.282
DM: R114.2 U11.64 | length 19.2
  Layer 1 - Top Layer w0.178: R114.2@105.41,7.458 v1(105.41,8.382) ; v1(110.109,21.642) U11.64@111.5,21.642
  Layer 4 - Bottom Layer w0.178: v1(105.41,8.382) 105.791,8.763 105.791,20.224 106.929,21.361 109.828,21.361 v1(110.109,21.642)
DP: R115.2 U11.62 | length 18.6
  Layer 1 - Top Layer w0.178: R115.2@106.553,7.458 v1(106.553,8.382) ; v1(110.109,20.642) U11.62@111.5,20.642
  Layer 4 - Bottom Layer w0.178: v1(106.553,8.382) 106.172,8.763 106.172,20.066 107.086,20.98 109.771,20.98 v1(110.109,20.642)
DSG: D9.1 D10.1 R68.1 TP35.1 U1.43 | length 57.6
  Layer 1 - Top Layer w0.254: v1(68.326,37.842) U1.43@69.757,37.842
  Layer 4 - Bottom Layer w0.508: v1(68.326,37.842) 69.469,37.842 78.744,47.117 81.026,47.117 83.185,49.276 83.185,75.133 79.869,78.449 79.869,80.151 79.248,80.772 TP35.1@78.105,80.772 75.872,80.772 R68.1@75.819,80.719
EXTTS2: J2.5 J7.1 | length 133
  Layer 1 - Top Layer w0.254: v1(49.657,18.161) J7.1@49.657,20.088
  Layer 3 - Signal w0.254: v1(49.657,18.161) 52.197,15.621 62.992,15.621 67.818,20.447 83.947,20.447 98.679,35.179 98.679,84.709 88.138,95.25 82.55,95.25 J2.5@80.518,97.282
FBAT: C29.2 C37.2 D4.2 F1.3 NT2.1 Q3.1 Q3.2 Q3.3 Q8.1 Q8.2 Q8.3 R33.1 R39.1 R46.1 R50.1 TP21.1
  other v1: 22.098,92.075 22.86,92.075 23.622,92.075 22.479,92.71 23.241,92.71 21.082,94.869 21.082,95.631 21.844,95.631 21.082,96.393 21.844,96.393 21.082,97.155 21.844,97.155 21.844,97.917 21.844,98.679 21.844,99.441
FUSE: R59.2 U1.38 | length 74.1
  Layer 1 - Top Layer w0.254: R59.2@19.596,66.929 21.336,66.929 v1(22.733,68.326) ; v1(67.437,35.052) 67.727,35.342 U1.38@69.757,35.342
  Layer 4 - Bottom Layer w0.254: v1(22.733,68.326) 22.86,68.326 23.876,69.342 32.917,69.342 34.925,67.334 34.925,55.499 39.243,51.181 52.197,51.181 64.516,38.862 64.516,36.068 65.532,35.052 v1(67.437,35.052)
HDQ: E5.1 J12.2 J13.2 J22.5 TP38.1 U1.28 U8.1 | length 131.6
  Layer 1 - Top Layer w0.254: U1.28@64.282,33.367 64.282,24.491 65.011,23.762 67.805,23.762 68.961,22.606 74.676,22.606 76.686,24.616 J13.2@81.407,24.616 86.846,24.616 88.011,25.781 88.011,54.991 TP38.1@90.17,57.15 J12.2@93.345,57.15
  Layer 4 - Bottom Layer w0.254: TP38.1@90.17,57.15 90.17,59.944 91.313,61.087 91.313,63.881 90.932,64.262 90.932,85.598 94.107,88.773 111.506,88.773 112.517,89.784 U8.1@112.517,95.631 112.517,97.277 J22.5@112.522,97.282 E5.1@112.522,98.806
LD: D12.1 R76.2 TP34.1 U1.41 | length 60.8
  Layer 1 - Top Layer w0.254: v1(67.437,37.338) 67.933,36.842 U1.41@69.757,36.842
  Layer 4 - Bottom Layer w0.508: v1(67.437,37.338) 67.437,38.227 68.072,38.862 69.215,38.862 82.169,51.816 82.169,73.914 78.994,77.089 73.152,77.089 72.263,77.978 R76.2@71.3,77.978 70.993,77.671 TP34.1@70.993,75.692
LED1: D14.1 U11.15 | length 44.4
  Layer 1 - Top Layer w0.203: v1(83.312,2.629) D14.1@84.328,2.629 ; U11.15@102.525,31.617 102.525,30.405 v1(103.085,29.845)
  Layer 4 - Bottom Layer w0.203: v1(83.312,2.629) 84.544,1.397 90.464,1.397 94.742,5.675 94.742,10.465 102.54,18.263 102.54,28.702 103.085,29.247 v1(103.085,29.845)
LED2: D15.1 U11.16 | length 39.8
  Layer 1 - Top Layer w0.203: v1(86.233,2.629) D15.1@87.249,2.629 ; v1(102.025,29.845) U11.16@102.025,31.617
  Layer 4 - Bottom Layer w0.203: v1(86.233,2.629) 86.957,1.905 90.083,1.905 94.165,5.987 94.165,10.606 102.032,18.473 v1@102.032,29.845
LED3: D16.1 U11.17 | length 36.1
  Layer 1 - Top Layer w0.203: v1(89.154,2.629) D16.1@90.17,2.629 ; v1(100.965,29.845) 101.525,30.405 U11.17@101.525,31.617
  Layer 4 - Bottom Layer w0.203: v1(89.154,2.629) 90.005,2.629 93.53,6.154 93.53,10.69 101.524,18.683 101.524,28.702 100.965,29.261 v1(100.965,29.845)
NetC1_1: C1.1 C2.1 C3.1 R1.1 TP2.1 U1.47 | length 12.6
  Layer 1 - Top Layer w0.254: U1.47@69.757,39.842 70.957,39.842 71.755,40.64 C3.1@71.882,40.64
  Layer 1 - Top Layer w0.762: C3.1@71.882,40.64 73.063,40.64 C2.1@73.66,40.043 75.554,40.043 C1.1@75.565,40.054 75.703,39.916 R1.1@77.343,39.916 81.623,39.916 TP2.1@81.661,39.878
NetC3_2: C3.2 TP3.1 U1.46 | length 10.6
  Layer 1 - Top Layer w0.254: U1.46@69.757,39.342 70.97,39.342 71.704,38.608 C3.2@71.882,38.608 72.39,38.1 72.39,37.211 74.041,35.56 77.216,35.56 TP3.1@77.978,36.322
NetC25_2: C25.2 C26.1 TP10.1 U1.24 | length 9.7
  Layer 1 - Top Layer w0.254: TP10.1@59.182,26.289 61.595,28.702 C25.2@61.595,31.242 61.379,31.458 C26.1@61.379,33.02 61.307,33.092 U1.24@61.307,34.842
NetC29_1: C29.1 C30.2
NetC31_1: C31.1 C33.2 R34.2 U2.4 | length 29.2
  Layer 4 - Bottom Layer w0.254: R34.2@6.642,77.851 6.642,76.619 6.096,76.073 2.286,76.073 1.397,75.184 1.397,70.104 2.159,69.342 9.398,69.342 10.16,68.58 10.16,65.913 10.579,65.494 C33.2@11.557,65.494 ; C33.2@11.557,65.46 U2.4@13.122,65.46 ; C31.1@12.662,64.008 13.122,64.468 U2.4@13.122,65.46 ; U2.4@13.122,65.684 U2.4@13.122,65.46
NetC31_2: C31.2 R32.2 U2.2 U2.3 | length 38.8
  Layer 4 - Bottom Layer w0.254: R32.2@6.642,81.28 6.642,80.048 6.096,79.502 2.286,79.502 0.762,77.978 0.762,69.85 1.905,68.707 8.89,68.707 9.398,68.199 9.398,63.119 9.779,62.738 13.843,62.738 14.262,63.157 C31.2@14.262,64.008 13.772,64.498 U2.3@13.772,65.46 ; U2.3@13.792,65.46 U2.2@14.402,65.46
NetC32_2: C32.2 R31.2 U2.1 | length 43.3
  Layer 1 - Top Layer w0.254: v1(6.223,89.281) R31.2@6.223,90.132
  Layer 4 - Bottom Layer w0.254: v1(6.223,89.281) 16.764,89.281 19.812,86.233 19.812,76.454 21.666,74.6 21.666,66.37 20.756,65.46 U2.1@15.047,65.46
NetC33_1: C33.1 C35.2 R36.2 U2.5 | length 12
  Layer 1 - Top Layer w0.254: v1(6.642,73.279) 6.642,71.844 v1(8.382,70.104)
  Layer 4 - Bottom Layer w0.254: v1(6.642,73.279) R36.2@6.642,74.295 ; v1(8.382,70.104) 9.779,70.104 10.833,69.05 C35.2@11.557,69.05 C33.1@11.557,67.094 ; C35.2@11.557,69.16 U2.5@13.122,69.16
NetC34_2: C34.2 C36.1
NetC35_1: C35.1 C39.2 R37.2 U2.6 | length 8.7
  Layer 4 - Bottom Layer w0.254: R37.2@6.642,70.739 6.769,70.866 11.341,70.866 C35.1@11.557,70.65 11.595,70.612 C39.2@13.297,70.612 13.772,70.137 U2.6@13.772,68.936
NetC37_1: C37.1 C38.2
NetC40_1: C40.1 C43.2 R49.2 U3.4 | length 29.1
  Layer 4 - Bottom Layer w0.254: R49.2@6.642,63.881 6.642,62.649 6.096,62.103 2.286,62.103 1.397,61.214 1.397,53.086 2.197,52.286 C43.2@11.557,52.286 ; C43.2@11.557,52.252 U3.4@13.122,52.252 ; C40.1@12.662,50.8 13.122,51.26 U3.4@13.122,52.252 ; U3.4@13.122,52.476 U3.4@13.122,52.252
NetC40_2: C40.2 R47.2 U3.2 U3.3 | length 37.4
  Layer 4 - Bottom Layer w0.254: R47.2@6.642,67.31 6.642,66.078 6.096,65.532 2.286,65.532 0.762,64.008 0.762,52.705 1.778,51.689 7.62,51.689 9.779,49.53 13.843,49.53 14.262,49.949 C40.2@14.262,50.8 13.772,51.29 U3.3@13.772,52.252 ; U3.3@13.792,52.252 U3.2@14.402,52.252
NetC41_2: C41.2 R41.2 U3.1 | length 3.3
  Layer 4 - Bottom Layer w0.254: U3.1@15.047,52.252 R41.2@18.303,52.252
NetC42_2: C42.2 C45.1
NetC43_1: C43.1 C44.2 R53.2 U3.5 | length 9.4
  Layer 1 - Top Layer w0.254: v1(7.112,55.88) v1(10.541,55.88)
  Layer 4 - Bottom Layer w0.254: R53.2@6.642,57.15 6.642,56.35 v1(7.112,55.88) ; v1(10.541,55.88) 11.519,55.88 C44.2@11.557,55.842 C43.1@11.557,53.886 ; C44.2@11.557,55.952 U3.5@13.122,55.952
NetC44_1: C44.1 C46.2 R54.2 U3.6 | length 10.1
  Layer 4 - Bottom Layer w0.254: R54.2@6.642,53.721 10.363,57.442 C44.1@11.557,57.442 11.595,57.404 C46.2@13.297,57.404 13.772,56.929 U3.6@13.772,55.728
NetC47_2: C47.2 D8.1 D13.3 Q12.4 R44.2 R59.1 R60.2 R66.2 R80.2 TP29.1 | length 65.7
  Layer 1 - Top Layer w0.508: Q12.4@16.37,86.995 v1(16.37,87.757) ; v1(17.907,64.389) 17.907,66.84 R59.1@17.996,66.929 R66.2@17.996,68.326 C47.2@17.996,69.723 18.161,69.888 18.161,71.36 D8.1@18.301,71.501 18.415,71.614 TP29.1@18.415,73.914
  Layer 4 - Bottom Layer w0.508: v1(16.37,87.757) 18.415,85.712 TP29.1@18.415,73.914 19.723,73.914 R44.2@20.32,73.317 ; v1(17.907,64.389) R60.2@17.907,61.76 21.425,61.76 22.352,60.833 22.352,34.671 21.524,33.843 D13.3@17.983,33.843
NetC48_1: C48.1 C50.2 R72.2 U4.4 | length 32.8
  Layer 4 - Bottom Layer w0.254: R72.2@6.642,46.736 6.642,45.504 6.096,44.958 2.286,44.958 1.397,44.069 1.397,35.814 2.032,35.179 11.938,35.179 12.662,35.903 C48.1@12.662,38.1 13.122,38.56 U4.4@13.122,39.552 ; C50.2@11.557,39.552 U4.4@13.122,39.552 ; U4.4@13.122,39.776 U4.4@13.122,39.552
NetC48_2: C48.2 R69.2 U4.2 U4.3 | length 38.4
  Layer 4 - Bottom Layer w0.254: R69.2@6.642,50.165 6.642,48.933 6.096,48.387 2.286,48.387 0.762,46.863 0.762,35.433 1.651,34.544 13.081,34.544 14.262,35.725 C48.2@14.262,38.1 13.772,38.59 U4.3@13.772,39.552 ; U4.3@13.792,39.552 U4.2@14.402,39.552
NetC49_2: C49.2 R67.2 U4.1 | length 3.3
  Layer 4 - Bottom Layer w0.254: U4.1@15.047,39.552 R67.2@18.303,39.552
NetC50_1: C50.1 C51.2 R75.2 U4.5 | length 8.5
  Layer 1 - Top Layer w0.254: v1(7.658,43.18) v1(10.541,43.18)
  Layer 4 - Bottom Layer w0.254: R75.2@6.642,43.18 v1(7.658,43.18) ; v1(10.541,43.18) 11.519,43.18 C51.2@11.557,43.142 C50.1@11.557,41.186 ; C51.2@11.557,43.252 U4.5@13.122,43.252
NetC51_1: C51.1 C52.2 R78.2 U4.6 | length 14.3
  Layer 4 - Bottom Layer w0.254: R78.2@6.642,36.703 6.642,40.805 10.579,44.742 C51.1@11.557,44.742 11.595,44.704 C52.2@13.297,44.704 13.772,44.229 U4.6@13.772,43.028
NetC53_1: C53.1 C55.2 R84.2 U5.4 | length 30.3
  Layer 4 - Bottom Layer w0.254: R84.2@6.642,29.718 6.642,28.486 6.096,27.94 2.286,27.94 1.397,27.051 1.397,22.098 2.159,21.336 11.303,21.336 12.7,22.733 12.7,25.438 13.122,25.86 U5.4@13.122,26.852 ; C55.2@11.557,26.852 U5.4@13.122,26.852 ; U5.4@13.122,27.076 U5.4@13.122,26.852
NetC53_2: C53.2 R83.2 U5.2 U5.3 | length 36.3
  Layer 4 - Bottom Layer w0.254: R83.2@6.642,33.147 6.642,31.915 6.096,31.369 2.286,31.369 0.762,29.845 0.762,21.717 1.778,20.701 13.081,20.701 14.262,21.882 C53.2@14.262,25.4 13.772,25.89 U5.3@13.772,26.852 ; U5.3@13.792,26.852 U5.2@14.402,26.852
NetC54_2: C54.2 R81.2 U5.1 | length 3.3
  Layer 4 - Bottom Layer w0.254: U5.1@15.047,26.852 R81.2@18.303,26.852